# Altium PCB hk-pcb.pcbdoc
Units mil, origin at the board's own origin, x right, y up, seen from the top; angles counter-clockwise.
Board outline 5025 x 2925 mil, 2 copper layers (Top Layer, Bottom Layer); 3 components, 45 nets, 56 pads, 3 vias.
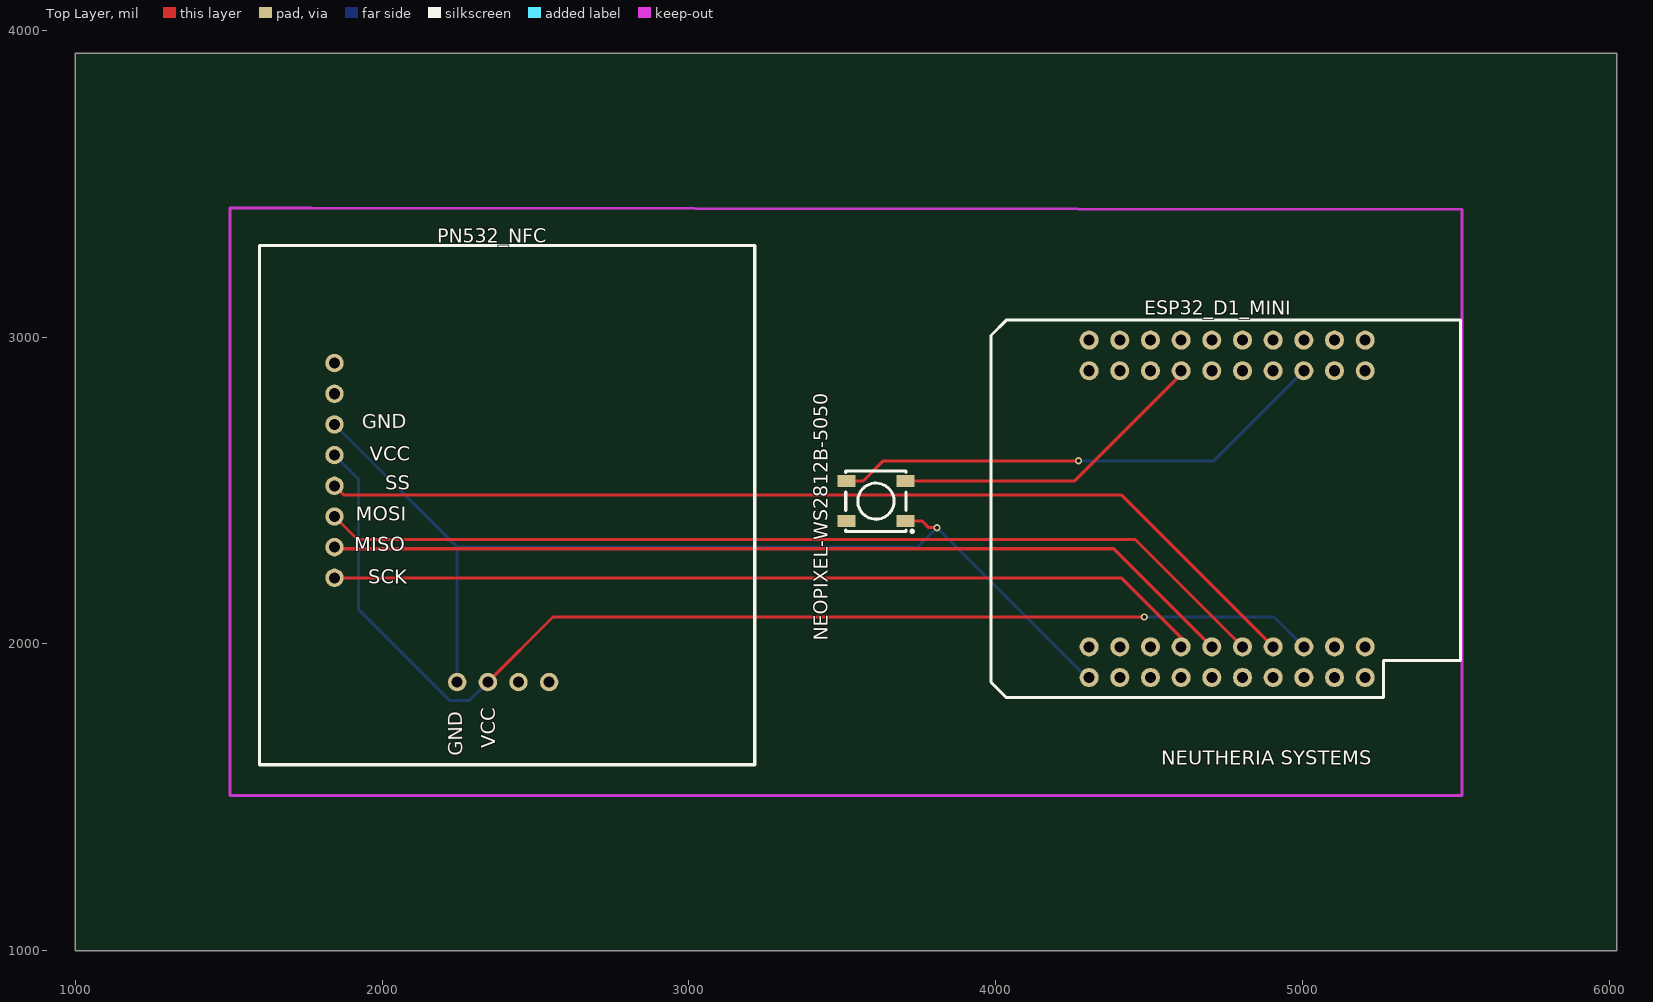
[diagram p0: Top Layer view]
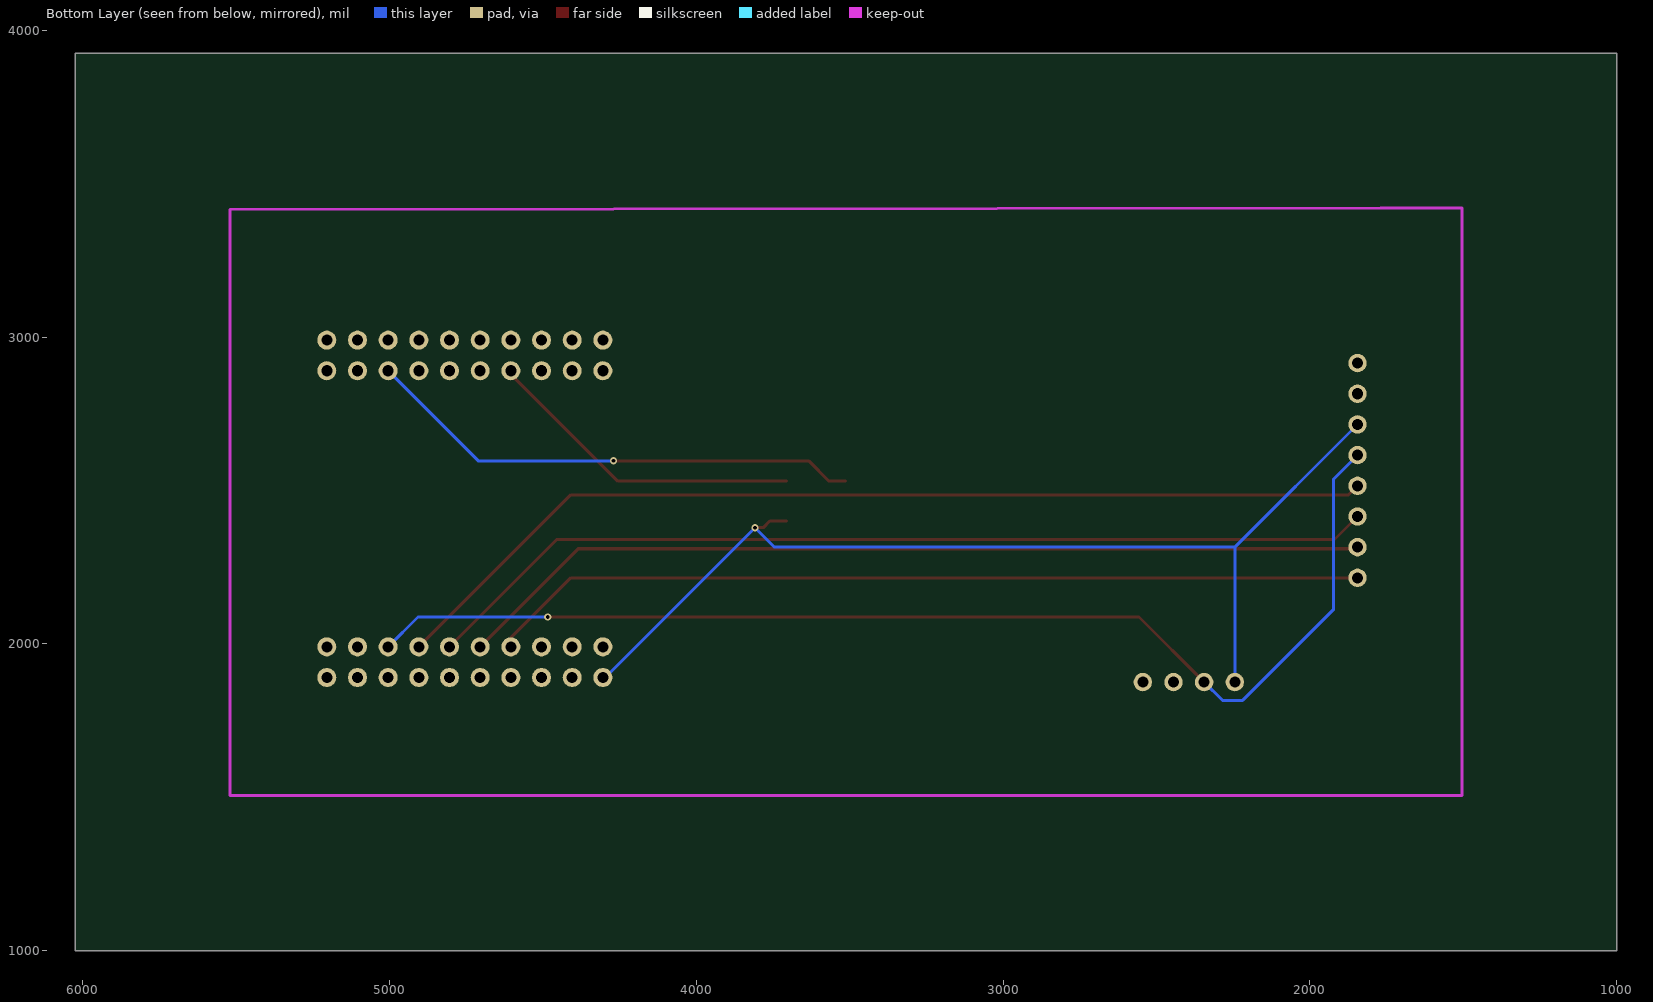
[diagram p1: Bottom Layer view, seen from below]

## Layer stack, top to bottom
Top Layer: signal copper (thickness not stored)
Dielectric: dielectric 12.6, FR-4, Dk 4.8
Bottom Layer: signal copper (thickness not stored)

## Board outline
6025,1000 1000,1000 1000,3925 6025,3925

## Components (designator, comment, footprint, x,y, rotation, side; value= is the part's Value field where it differs from the comment)
ESP32_D1_MINI "SCHLIB_AZ-Delivery-ESP32-D1-Mini_2024-06-09" "AZ DELIVERY ESP32 D1 MINI" 4754.99,2440.03 r90 top
NEOPIXEL-WS2812B-5050 "WS2812B-5050RGB" LED-SMD_4P-L5.0-W5.0-BR_WS2812B-5050RGB 3610,2465 r0 top
PN532_NFC "PN532 NFC RFID Module" "PN532 NFC RFID MODULE" 2195,2395 r0 top

## Footprints (in the part's own frame and the unit in brackets; to place one, negate y for a bottom-side part, rotate by r counter-clockwise, add the part's x,y. Pads: shape width x height; smd on the part's side, far side on the other; paste and mask are expansions set on the pad)
"AZ DELIVERY ESP32 D1 MINI" [mil]
  round 62 hole 36 paste+0 mask+2: 1(-550,450) 2(-450,450) 3(450,450) 4(550,450) 5(-550,350) 6(-450,350) 7(450,350) 8(550,350) 9(-550,250) 10(-450,250) 11(450,250) 12(550,250) 13(-550,150) 14(-450,150) 15(450,150) 16(550,150) 17(-550,50) 18(-450,50) 19(450,50) 20(550,50) 21(-550,-50) 22(-450,-50) 23(450,-50) 24(550,-50) 25(-550,-150) 26(-450,-150) 27(450,-150) 28(550,-150) 29(-550,-250) 30(-450,-250) 31(450,-250) 32(550,-250) 33(-550,-350) 34(-450,-350) 35(450,-350) 36(550,-350) 37(-550,-450) 38(-450,-450) 39(450,-450) 40(550,-450)
  silkscreen extent -615,-760 615,770
LED-SMD_4P-L5.0-W5.0-BR_WS2812B-5050RGB [mm]
  rect 1.5x1 smd paste+0 mask+0.051: 1(2.45,-1.65) 2(2.45,1.65) 3(-2.45,1.65) 4(-2.45,-1.65)
  silkscreen extent -2.5,-2.6 3.1,2.5
"PN532 NFC RFID MODULE" [mil]
  round 60 hole 36 paste+0 mask+2: 1(-350,-180) 2(-350,-80) 3(-350,20) 4(-350,120) 5(-350,220) 6(-350,320) 7(-350,420) 8(-350,520) 9(50,-520) 10(150,-520) 11(250,-520) 12(350,-520)
  silkscreen extent -594,-789 1020,903

## Via types
v1: diameter 24.02, hole 12.01, Top Layer to Bottom Layer, tented both sides, 3 vias

## Nets (pads, with @x,y where several pads share a name; then routed paths per layer and width w, separated by ;. In a path a pad name is that pad's centre, name@x,y a point inside that pad or via, vN(x,y) a via of type N, cw(c..) or ccw(c..) an arc to the next point about the centre after c; other vN are vias at no path point)
+5V: ESP32_D1_MINI.31 NEOPIXEL-WS2812B-5050.3 | length 1640.6
  Top Layer w10: NEOPIXEL-WS2812B-5050.3@3513.55,2529.96 3567.76,2529.96 3634.22,2596.42 v1(4270.62,2596.42)
  Bottom Layer w10: v1(4270.62,2596.42) 4711.38,2596.42 ESP32_D1_MINI.31
ESP32_D1_MINI_2: ESP32_D1_MINI.2
ESP32_D1_MINI_3: ESP32_D1_MINI.3
ESP32_D1_MINI_4: ESP32_D1_MINI.4
ESP32_D1_MINI_5: ESP32_D1_MINI.5
ESP32_D1_MINI_6: ESP32_D1_MINI.6
ESP32_D1_MINI_7: ESP32_D1_MINI.7
ESP32_D1_MINI_8: ESP32_D1_MINI.8
ESP32_D1_MINI_9: ESP32_D1_MINI.9
ESP32_D1_MINI_10: ESP32_D1_MINI.10
ESP32_D1_MINI_11: ESP32_D1_MINI.11
ESP32_D1_MINI_12: ESP32_D1_MINI.12
ESP32_D1_MINI_13: ESP32_D1_MINI.13
ESP32_D1_MINI_15: ESP32_D1_MINI.15 NEOPIXEL-WS2812B-5050.2 | length 1054.3
  Top Layer w10: NEOPIXEL-WS2812B-5050.2 4256.15,2529.96 4604.99,2878.8 ESP32_D1_MINI.15
ESP32_D1_MINI_16: ESP32_D1_MINI.16
ESP32_D1_MINI_17: ESP32_D1_MINI.17
ESP32_D1_MINI_19: ESP32_D1_MINI.19
ESP32_D1_MINI_20: ESP32_D1_MINI.20
ESP32_D1_MINI_21: ESP32_D1_MINI.21
ESP32_D1_MINI_23: ESP32_D1_MINI.23
ESP32_D1_MINI_24: ESP32_D1_MINI.24
ESP32_D1_MINI_25: ESP32_D1_MINI.25
ESP32_D1_MINI_27: ESP32_D1_MINI.27
ESP32_D1_MINI_28: ESP32_D1_MINI.28
ESP32_D1_MINI_29: ESP32_D1_MINI.29
ESP32_D1_MINI_32: ESP32_D1_MINI.32
ESP32_D1_MINI_33: ESP32_D1_MINI.33
ESP32_D1_MINI_34: ESP32_D1_MINI.34
ESP32_D1_MINI_35: ESP32_D1_MINI.35
ESP32_D1_MINI_36: ESP32_D1_MINI.36
ESP32_D1_MINI_37: ESP32_D1_MINI.37
ESP32_D1_MINI_38: ESP32_D1_MINI.38
ESP32_D1_MINI_39: ESP32_D1_MINI.39
ESP32_D1_MINI_40: ESP32_D1_MINI.40
GND: ESP32_D1_MINI.1 NEOPIXEL-WS2812B-5050.1 PN532_NFC.6 PN532_NFC.9 | length 3406
  Top Layer w10: NEOPIXEL-WS2812B-5050.1 3760.72,2400.04 3782.24,2378.52 v1(3809.26,2378.52)
  Bottom Layer w10: PN532_NFC.6 2245,2315 ; PN532_NFC.9 2245,2315 ; ESP32_D1_MINI.1 4297.75,1890.03 v1(3809.26,2378.52) 3745.74,2315 2245,2315
NEOPIXEL-WS2812B-5050_4: NEOPIXEL-WS2812B-5050.4
PN532_NFC_1: ESP32_D1_MINI.14 PN532_NFC.1 | length 2870.4
  Top Layer w10: PN532_NFC.1 4409.5,2215 4604.99,2019.51 ESP32_D1_MINI.14
PN532_NFC_2: ESP32_D1_MINI.18 PN532_NFC.2 | length 2994.6
  Top Layer w10: PN532_NFC.2 1850.31,2309.69 4385.33,2309.69 ESP32_D1_MINI.18
PN532_NFC_3: ESP32_D1_MINI.22 PN532_NFC.3 | length 3136
  Top Layer w10: PN532_NFC.3 1920.3,2339.7 4455.32,2339.7 ESP32_D1_MINI.22
PN532_NFC_4: ESP32_D1_MINI.26 PN532_NFC.4 | length 3277.4
  Top Layer w10: PN532_NFC.4 1874.59,2485.41 4409.61,2485.41 ESP32_D1_MINI.26
PN532_NFC_7: PN532_NFC.7
PN532_NFC_8: PN532_NFC.8
PN532_NFC_11: PN532_NFC.11
PN532_NFC_12: PN532_NFC.12
VCC: ESP32_D1_MINI.30 PN532_NFC.5 PN532_NFC.10 | length 3893.1
  Top Layer w10: PN532_NFC.10 2557.33,2087.33 v1(4485.18,2087.33)
  Bottom Layer w10: PN532_NFC.5 1922.79,2537.21 1922.79,2112.11 2219.47,1815.43 2285.43,1815.43 PN532_NFC.10 ; v1(4485.18,2087.33) 4907.69,2087.33 ESP32_D1_MINI.30

## Silkscreen, mask and mechanical layers (free items; w line width, h text height)
Top Overlay:
  text "GND" at 1934.99,2685.03 h80 r1
  text "VCC" at 1959.99,2580.03 h80
  text "SS" at 2009.99,2485.03 h80
  text "MOSI" at 1914.99,2385.03 h80
  text "MISO" at 1909.99,2285.03 h80
  text "SCK" at 1954.99,2180.03 h80
  text "VCC" at 2384.99,1660.03 h80 r90
  text "GND" at 2279.99,1635.03 h80 r91
  text "NEUTHERIA SYSTEMS" at 4540,1590 h80